# EAGLE board headstage-64_bga_true-lvds (EAGLE 8.3.2), part 1 of 2
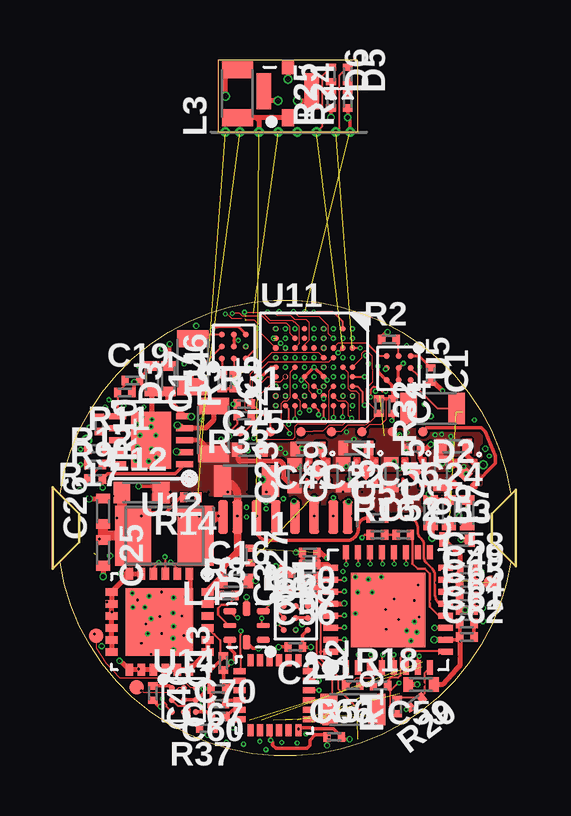
[diagram p0: board, top side]
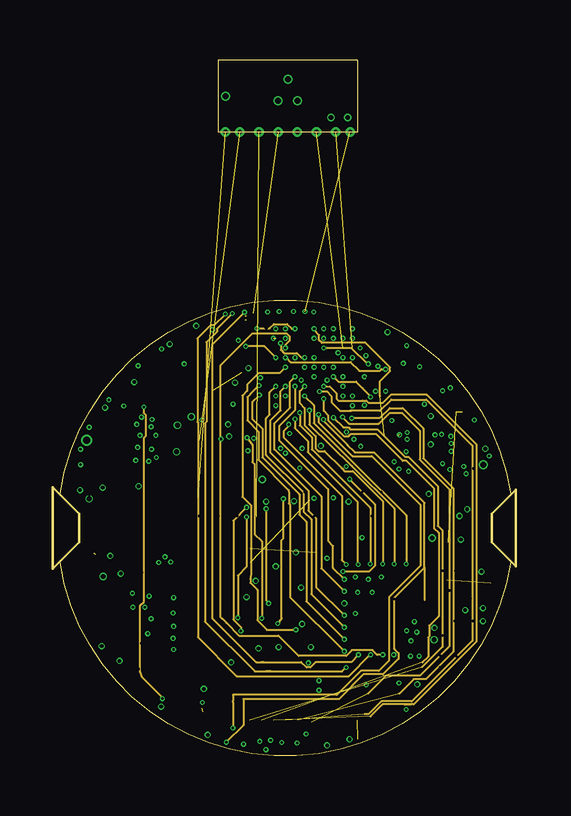
[diagram p1: board, inner layer Route1]
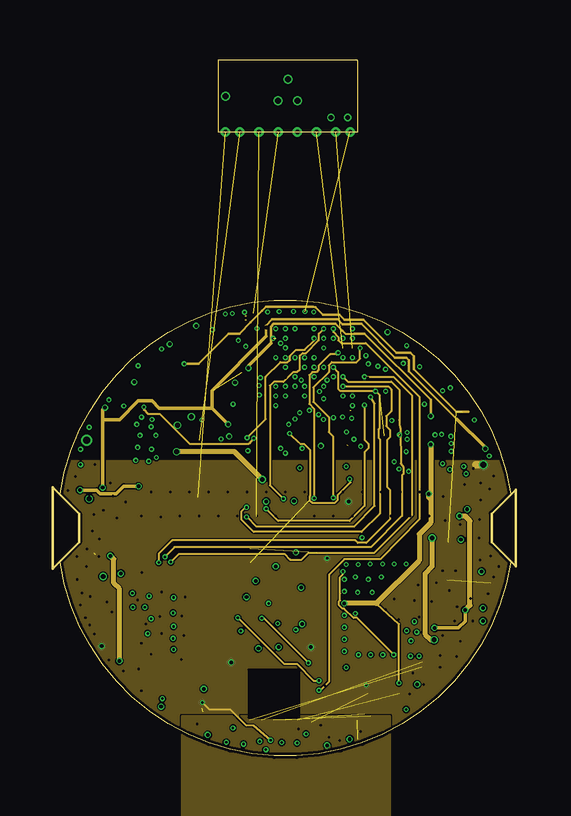
[diagram p2: board, inner layer Route2]
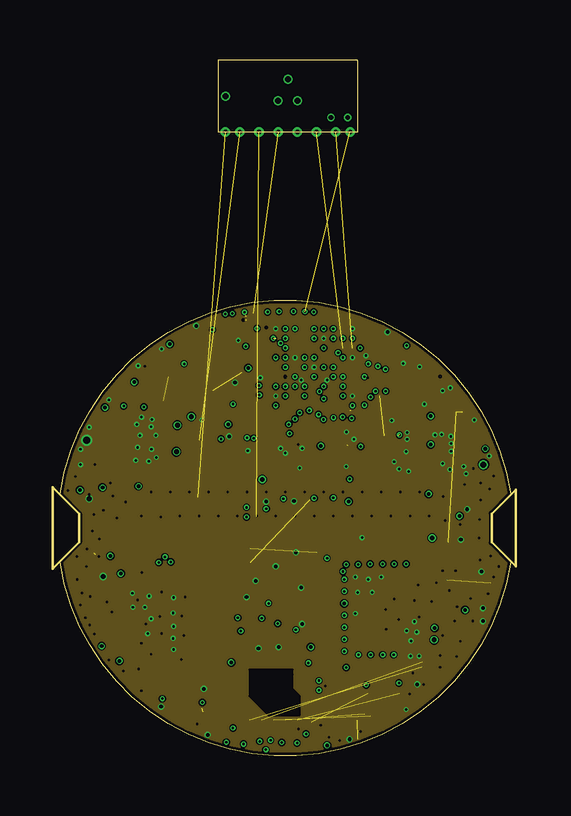
[diagram p3: board, inner layer Route3/GND]
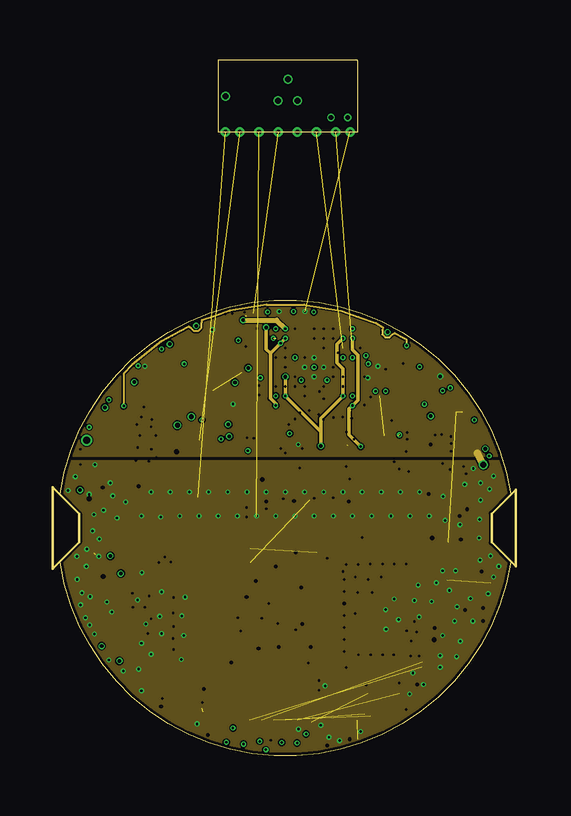
[diagram p4: board, inner layer PWR/AGND]
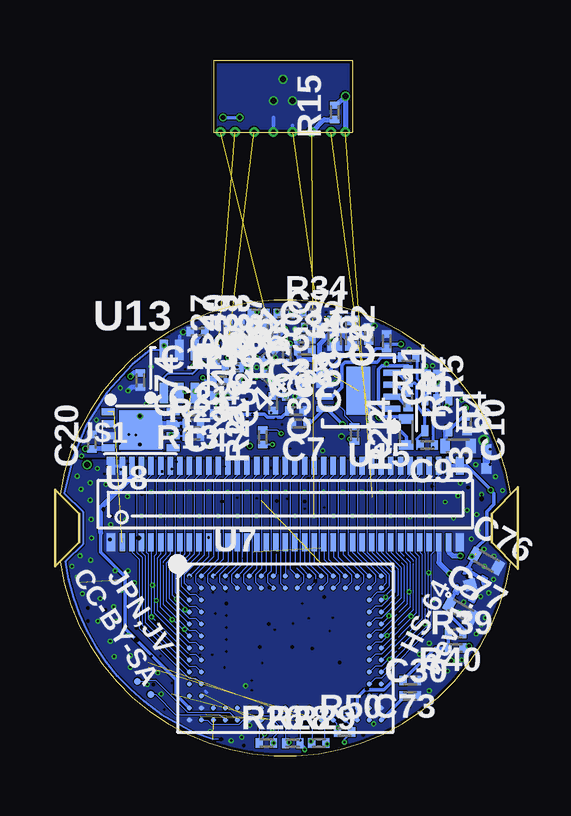
[diagram p5: board, bottom side, seen from below]

Size 18.8 x 28.99 mm. Coordinates in mm from the lower left corner, seen from the top.
Outline: 12.4,25.99 6.6,25.99 6.6,28.99 12.4,28.99 12.4,25.99
Outline: 0,10.89 0.8,10.09 0.8,8.89 0,8.09 arc163 18.8,8.09 18,8.89 18,10.09 18.8,10.89 arc163 0,10.89
Copper layers ((1+2*3+4)*(5+16)): Top 0.036mm / dielectric 4mil / Route1 0.036mm / dielectric 5mil / Route2 0.036mm / dielectric 0.10921875mm / Route3/GND 0.036mm / dielectric 5mil / PWR/AGND 0.036mm / dielectric 4mil / Bottom 0.036mm
Design rules "speedy-6-layer *": minimum track width 2mil, minimum drill 0.1mm, track to track 2mil, track to pad 2mil, pad to pad 2mil, via to via 2mil, smd to smd 2mil, copper to edge 5mil, drill to drill 5mil, minimum pad ring 2mil, minimum via ring 2mil, stop-mask expansion 1mil, vias tented up to drill 20mil, thermal gap 10mil
Net classes: 1 thick: width 0.102 mm
tKeepout: area -0.1,6.6 to 1.4,12.4; area 17.4,6.6 to 18.9,12.4
tRestrict: area -0.1,6.6 to 1.4,12.4; area 17.4,6.6 to 18.9,12.4
Milling: 8 lines

## Footprints (pad centres in the part's own frame; a part is rotated, then mirrored left to right if it is on the bottom)
0201T = smd 0.3 x 0.4: 1 -0.3,0; 2 0.3,0
0402T = smd 0.4 x 0.6: 1 -0.533,0; 2 0.533,0
0805T = smd 0.7 x 1.3: 1 -1,0; 2 1,0
LED-0201T = smd 0.3 x 0.4: 1 -0.3,0; 2 0.3,0
HEADSTAGE64-EDGE-MOUNT_PADS = smd 0.4 x 1.4: 1 -2.6,0; 2 -2,0; 3 -1.2,0; 4 -0.4,0; 5 0.4,0; 6 1.2,0; 7 2,0; 8 2.6,0
HEADSTAGE64-EDGE-MOUNT_CASTELLATED = drill 0.2 pad 0.406: 1 -2.6,0; 2 -2,0; 3 -1.2,0; 4 -0.4,0; 5 0.4,0; 6 1.2,0; 7 2,0; 8 2.6,0
0201_LINK = smd 0.432 x 0.432: 1 -0.394,0; 2 0.394,0
1210T = smd 1.5 x 2.5: 1 -1.3,0; 2 1.3,0
0603T = smd 0.7 x 0.9: 1 -0.82,0; 2 0.82,0
B0.4MM = smd 0.4 x 0.4: TP 0,0
TP06R = smd 0.6 x 0.6: TP 0,0
B0.3MM = smd 0.3 x 0.3: TP 0,0
WLCSP3X3 = smd 0.25 x 0.25: A1 -0.5,0.5; A2 0,0.5; A3 0.5,0.5; B1 -0.5,0; B2 0,0; B3 0.5,0; C1 -0.5,-0.5; C2 0,-0.5; C3 0.5,-0.5
QFN24-3X3_NO-PAD = smd 0.5 x 0.25: 1 -1.45,1; 2 -1.45,0.6; 3 -1.45,0.2; 4 -1.45,-0.2; 5 -1.45,-0.6; 6 -1.45,-1; 13 1.45,-0.2; 14 1.45,-0.6; 15 1.45,-1; 16 1.45,0.2; 17 1.45,0.6; 18 1.45,1 | smd 0.25 x 0.5: 7 -0.2,-1.45; 8 -0.6,-1.45; 9 -1,-1.45; 10 0.2,-1.45; 11 0.6,-1.45; 12 1,-1.45; 19 0.2,1.45; 20 0.6,1.45; 21 1,1.45; 22 -0.2,1.45; 23 -0.6,1.45; 24 -1,1.45
QFN24-4X4 = smd 0.5 x 0.3: 1 -2,1.25; 2 -2,0.75; 3 -2,0.25; 4 -2,-0.25; 5 -2,-0.75; 6 -2,-1.25; 13 2,-1.25; 14 2,-0.75; 15 2,-0.25; 16 2,0.25; 17 2,0.75; 18 2,1.25 | smd 0.3 x 0.5: 7 -1.25,-2; 8 -0.75,-2; 9 -0.25,-2; 10 0.25,-2; 11 0.75,-2; 12 1.25,-2; 19 1.25,2; 20 0.75,2; 21 0.25,2; 22 -0.25,2; 23 -0.75,2; 24 -1.25,2 | smd 2.8 x 2.8: PAD 0,0
PDSO-N5 = smd 0.45 x 0.3: 1 -0.65,0.5; 2 -0.65,0; 3 -0.65,-0.5; 4 0.65,-0.5; 5 0.65,0.5
BGA104_0.5MM = smd 0.2 x 0.2: A1 -4,3; A2 -3.5,3; A3 -3,3; A4 -2.5,3; A5 -2,3; A6 -1.5,3; A7 -1,3; A8 -0.5,3; A9 0,3; A10 0.5,3; A11 1,3; A12 1.5,3; A13 2,3; A14 2.5,3; A15 3,3; A16 3.5,3; A17 4,3; B1 -4,2.5; B2 -3.5,2.5; B3 -3,2.5; B4 -2.5,2.5; B5 -2,2.5; B6 -1.5,2.5; B7 -1,2.5; B8 -0.5,2.5; B9 0,2.5; B10 0.5,2.5; B11 1,2.5; B12 1.5,2.5; B13 2,2.5; B14 2.5,2.5; B15 3,2.5; B16 3.5,2.5; B17 4,2.5; C1 -4,2; C2 -3.5,2; C16 3.5,2; C17 4,2; D1 -4,1.5; D2 -3.5,1.5; D16 3.5,1.5; D17 4,1.5; E1 -4,1; E2 -3.5,1; E16 3.5,1; E17 4,1; F1 -4,0.5; F2 -3.5,0.5; F16 3.5,0.5; F17 4,0.5; G1 -4,0; G2 -3.5,0; G16 3.5,0; G17 4,0; H1 -4,-0.5; H2 -3.5,-0.5; H16 3.5,-0.5; H17 4,-0.5; J1 -4,-1; J2 -3.5,-1; J16 3.5,-1; J17 4,-1; K1 -4,-1.5; K2 -3.5,-1.5; K16 3.5,-1.5; K17 4,-1.5; L1 -4,-2; L2 -3.5,-2; L16 3.5,-2; L17 4,-2; M1 -4,-2.5; M2 -3.5,-2.5; M3 -3,-2.5; M4 -2.5,-2.5; M5 -2,-2.5; M6 -1.5,-2.5; M7 -1,-2.5; M8 -0.5,-2.5; M9 0,-2.5; M10 0.5,-2.5; M11 1,-2.5; M12 1.5,-2.5; M13 2,-2.5; M14 2.5,-2.5; M15 3,-2.5; M16 3.5,-2.5; M17 4,-2.5; N1 -4,-3; N2 -3.5,-3; N3 -3,-3; N4 -2.5,-3; N5 -2,-3; N6 -1.5,-3; N7 -1,-3; N8 -0.5,-3; N9 0,-3; N10 0.5,-3; N11 1,-3; N12 1.5,-3; N13 2,-3; N14 2.5,-3; N15 3,-3; N16 3.5,-3; N17 4,-3
LFCSP8-2X3 = smd 0.55 x 0.3: 1 -1.35,0.75; 2 -1.35,0.25; 3 -1.35,-0.25; 4 -1.35,-0.75; 5 1.35,-0.75; 6 1.35,-0.25; 7 1.35,0.25; 8 1.35,0.75 | smd 1.8 x 1.65: PAD 0,0
X2SON = smd 0.21 x 0.21: 1 -0.45,0.4; 2 -0.45,-0.4; 3 0.45,-0.4; 4 0.45,0.4 | smd 0.48 x 0.48 rotated 45: 5 0,0
VBGA81-4X4 = smd 0.23 x 0.23: A1 1.6,1.6; A2 1.2,1.6; A3 0.8,1.6; A4 0.4,1.6; A5 0,1.6; A6 -0.4,1.6; A7 -0.8,1.6; A8 -1.2,1.6; A9 -1.6,1.6; B1 1.6,1.2; B2 1.2,1.2; B3 0.8,1.2; B4 0.4,1.2; B5 0,1.2; B6 -0.4,1.2; B7 -0.8,1.2; B8 -1.2,1.2; B9 -1.6,1.2; C1 1.6,0.8; C2 1.2,0.8; C3 0.8,0.8; C4 0.4,0.8; C5 0,0.8; C6 -0.4,0.8; C7 -0.8,0.8; C8 -1.2,0.8; C9 -1.6,0.8; D1 1.6,0.4; D2 1.2,0.4; D3 0.8,0.4; D4 0.4,0.4; D5 0,0.4; D6 -0.4,0.4; D7 -0.8,0.4; D8 -1.2,0.4; D9 -1.6,0.4; E1 1.6,0; E2 1.2,0; E3 0.8,0; E4 0.4,0; E5 0,0; E6 -0.4,0; E7 -0.8,0; E8 -1.2,0; E9 -1.6,0; F1 1.6,-0.4; F2 1.2,-0.4; F3 0.8,-0.4; F4 0.4,-0.4; F5 0,-0.4; F6 -0.4,-0.4; F7 -0.8,-0.4; F8 -1.2,-0.4; F9 -1.6,-0.4; G1 1.6,-0.8; G2 1.2,-0.8; G3 0.8,-0.8; G4 0.4,-0.8; G5 0,-0.8; G6 -0.4,-0.8; G7 -0.8,-0.8; G8 -1.2,-0.8; G9 -1.6,-0.8; H1 1.6,-1.2; H2 1.2,-1.2; H3 0.8,-1.2; H4 0.4,-1.2; H5 0,-1.2; H6 -0.4,-1.2; H7 -0.8,-1.2; H8 -1.2,-1.2; H9 -1.6,-1.2; J1 1.6,-1.6; J2 1.2,-1.6; J3 0.8,-1.6; J4 0.4,-1.6; J5 0,-1.6; J6 -0.4,-1.6; J7 -0.8,-1.6; J8 -1.2,-1.6; J9 -1.6,-1.6
DFN103X3 = smd 0.7 x 0.25: 1 -1.4,1; 2 -1.4,0.5; 3 -1.4,0; 4 -1.4,-0.5; 5 -1.4,-1; 6 1.4,-1; 7 1.4,-0.5; 8 1.4,0; 9 1.4,0.5; 10 1.4,1 | smd 1.65 x 2.38: PAD 0,0
SC70 = smd 0.35 x 0.85: 1 -0.65,-0.9; 2 0,-0.9; 3 0.65,-0.9; 4 0.65,0.9; 5 0,0.9; 6 -0.65,0.9
PWSON-N8-3X3 = smd 0.7 x 0.25: 1 -1.4,0.75; 2 -1.4,0.25; 3 -1.4,-0.25; 4 -1.4,-0.75; 5 1.4,-0.75; 6 1.4,-0.25; 7 1.4,0.25; 8 1.4,0.75 | smd 1 x 2: PAD 0,0
WQFN32-5X5 = smd 0.25 x 0.6: 1 1.75,2.4; 2 1.25,2.4; 3 0.75,2.4; 4 0.25,2.4; 5 -0.25,2.4; 6 -0.75,2.4; 7 -1.25,2.4; 8 -1.75,2.4; 17 -1.75,-2.4; 18 -1.25,-2.4; 19 -0.75,-2.4; 20 -0.25,-2.4; 21 0.25,-2.4; 22 0.75,-2.4; 23 1.25,-2.4; 24 1.75,-2.4 | smd 0.6 x 0.25: 9 -2.4,1.75; 10 -2.4,1.25; 11 -2.4,0.75; 12 -2.4,0.25; 13 -2.4,-0.25; 14 -2.4,-0.75; 15 -2.4,-1.25; 16 -2.4,-1.75; 25 2.4,-1.75; 26 2.4,-1.25; 27 2.4,-0.75; 28 2.4,-0.25; 29 2.4,0.25; 30 2.4,0.75; 31 2.4,1.25; 32 2.4,1.75 | smd 3.1 x 3.1: PAD 0,0
UQFN = smd 0.55 x 0.25: P$1 -0.7,0.6; P$3 -0.7,-0.6; P$5 0.7,-0.6; P$7 0.7,0.6 | smd 0.55 x 0.2: P$2 -0.7,0; P$6 0.7,0 | smd 0.3 x 0.6: P$4 0,-0.7; P$8 0,0.7
DF40-70HEAD = smd 0.23 x 0.75: 1 -6.8,-1.585; 2 -6.4,-1.585; 3 -6,-1.585; 4 -5.6,-1.585; 5 -5.2,-1.585; 6 -4.8,-1.585; 7 -4.4,-1.585; 8 -4,-1.585; 9 -3.6,-1.585; 10 -3.2,-1.585; 11 -2.8,-1.585; 12 -2.4,-1.585; 13 -2,-1.585; 14 -1.6,-1.585; 15 -1.2,-1.585; 16 -0.8,-1.585; 17 -0.4,-1.585; 18 0,-1.585; 19 0.4,-1.585; 20 0.8,-1.585; 21 1.2,-1.585; 22 1.6,-1.585; 23 2,-1.585; 24 2.4,-1.585; 25 2.8,-1.585; 26 3.2,-1.585; 27 3.6,-1.585; 28 4,-1.585; 29 4.4,-1.585; 30 4.8,-1.585; 31 5.2,-1.585; 32 5.6,-1.585; 33 6,-1.585; 34 6.4,-1.585; 35 6.8,-1.585; 36 6.8,1.585; 37 6.4,1.585; 38 6,1.585; 39 5.6,1.585; 40 5.2,1.585; 41 4.8,1.585; 42 4.4,1.585; 43 4,1.585; 44 3.6,1.585; 45 3.2,1.585; 46 2.8,1.585; 47 2.4,1.585; 48 2,1.585; 49 1.6,1.585; 50 1.2,1.585; 51 0.8,1.585; 52 0.4,1.585; 53 0,1.585; 54 -0.4,1.585; 55 -0.8,1.585; 56 -1.2,1.585; 57 -1.6,1.585; 58 -2,1.585; 59 -2.4,1.585; 60 -2.8,1.585; 61 -3.2,1.585; 62 -3.6,1.585; 63 -4,1.585; 64 -4.4,1.585; 65 -4.8,1.585; 66 -5.2,1.585; 67 -5.6,1.585; 68 -6,1.585; 69 -6.4,1.585; 70 -6.8,1.585 | smd 0.35 x 0.75: M1 -7.275,-1.585; M2 7.275,-1.585; M3 7.275,1.585; M4 -7.275,1.585
X_FL_R_SMT_1(02) = smd 0.5 x 0.7: P$1 0,-1.1 | smd 0.6 x 1.5: P$2 -1,0; P$4 1,0 | smd 0.5 x 0.6: P$3 0,1

## Placement (x,y rotation side)
C1  1uF  [0201T]  15.46,15.87 270 top
C2  0.1uF  [0201T]  9.81,4.54 180 top
C3  1uF  [0201T]  9.62,7.27 90 top
C4  0.1uF  [0201T]  13.9,14.57 270 top
C5  1uF  [0201T]  6.78,15.59 270 top
C6  0.1uF  [0201T]  5.92,17.57 90 bottom
C7  0.1uF  [0201T]  8.8,13.85 180 bottom
C8  0.1uF  [0201T]  5.18,17.27 90 bottom
C9  470pF  [0201T]  3.48,12.95 180 bottom
C10  0.1uF  [0201T]  1.82,13.81 270 bottom
C11  0.1uF  [0201T]  3.02,15.63 90 bottom
C12  0.1uF  [0201T]  13.06,17.67 180 bottom
C13  0.1uF  [0201T]  6.82,3.87 90 top
C14  1uF  [0402T]  4.36,13.49 90 bottom
C15  1uF  [0402T]  15.88,11.77 90 top
C16  1uF  [0402T]  7.32,7.29 0 top
C17  0.22uF  [0402T]  3.84,15.71 270 top
C18  0.22uF  [0402T]  2.2,12.91 0 bottom
C19  10pF  [0201T]  3.02,15.63 0 top
C20  0.1uF  [0201T]  17.47,13.09 90 bottom
C21  0.1uF  [0201T]  13.24,13.85 0 bottom
C22  10uF  [0402T]  12.34,12.82 180 top
C23  1uF  [0402T]  9.78,11.67 90 top
C24  10uF  [0402T]  16.44,12.9 180 top
C25  4.7uF  [0402T]  1.8,8.45 270 top
C26  0.1uF  [0402T]  1.8,10.19 90 top
C27  10nF  [0201T]  11.8,17.69 90 bottom
C28  47nF  [0201T]  11.1,16.69 135 bottom
C29  4.7nF  [0201T]  12.1,14.99 180 bottom
C30  10nF  [0201T]  4.2,2.49 0 bottom
C31  4.7nF  [0201T]  10.1,16.69 45 bottom
C32  4.7nF  [0201T]  8.96,14.37 0 bottom
C33  22nF  [0201T]  8.6,17.39 0 bottom
C34  47nF  [0201T]  8.6,16.89 0 bottom
C35  2.2nF  [0201T]  9.1,14.99 0 bottom
C36  0.1uF  [0201T]  9.9,14.69 270 bottom
C37  4.7nF  [0201T]  9.8,17.69 90 bottom
C38  10nF  [0201T]  10.3,17.69 90 bottom
C39  22nF  [0201T]  10.8,17.69 90 bottom
C40  0.47uF  [0201T]  11.3,17.69 90 bottom
C41  22uF  [0402T]  10.34,12.78 180 top
C42  10uF  [0402T]  7.34,17.61 270 bottom
C43  10nF  [0201T]  10.1,15.69 315 bottom
C44  22nF  [0201T]  11.08,15.69 225 bottom
C45  0.47uF  [0201T]  11.6,16.19 180 bottom
C46  1uF  [0201T]  3.88,2.61 270 top
C47  10nF  [0201T]  12.1,14.23 180 bottom
C48  0.1uF  [0201T]  10.42,7.97 180 top
C49  10nF  [0201T]  16.97,7.19 0 top
C50  10nF  [0201T]  10.42,8.47 180 top
C51  0.1uF  [0201T]  13.24,9.91 0 top
C52  47nF  [0201T]  14.32,9.21 0 top
C53  22uF  [0402T]  16.56,9.01 0 top
C54  1uF  [0402T]  13.82,11.71 90 top
C55  1uF  [0201T]  14.74,12.81 180 top
C56  0.1uF  [0201T]  10.42,7.01 180 top
C57  10nF  [0201T]  10.42,7.48 180 top
C58  0.1uF  [0201T]  16.97,7.75 0 top
C59  4.7uF  [0402T]  15.06,2.97 180 top
C60  0.1uF  [0201T]  6.6,2.17 180 top
C61  0.1uF  [0201T]  16.97,5.51 0 top
C62  10nF  [0201T]  16.97,4.95 0 top
C63  4.7uF  [0402T]  16.98,10.13 90 top
C64  0.1uF  [0201T]  16.97,6.07 0 top
C65  10nF  [0201T]  16.97,6.63 0 top
C66  10nF  [0201T]  11.44,0.79 0 top
C67  0.1uF  [0201T]  6.6,2.79 180 top
C68  1uF  [0201T]  8.64,15.83 270 bottom
C69  1uF  [0402T]  11.82,11.71 90 top
C70  0.1uF  [0201T]  6.62,1.63 0 top
C71  22nF  [0201T]  8.3,17.85 0 bottom
C72  0.47uF  [0201T]  12.34,16.67 270 bottom
C73  0.1uF  [0201T]  4.19,3.14 180 bottom
C74  1uF  [0201T]  15.44,15.65 270 bottom
C75  1uF  [0402T]  7.92,12.75 0 top
C76  1uF  [0402T]  1.02,8.12 330.9 bottom
C77  10uF  [0402T]  2.09,6.06 330.9 bottom
D1  [0805T]  12.22,1.93 0 top
D2  [0805T]  15.54,14.47 180 top
D3  [0805T]  5.54,16.37 90 top
D4  VSKY05401006  [0402T]  4.52,15.71 270 top
D5  XZVGR155W  [LED-0201T]  12,28.39 270 top
D6  XZVGR155W  [LED-0201T]  11.3,28.39 270 top
J1  HEADSTAGE64_EDGE-MOUNT  [HEADSTAGE64-EDGE-MOUNT_PADS]  9.4,9.95 0 top
J2  HEADSTAGE64_EDGE-MOUNT_CASTELLATED  [HEADSTAGE64-EDGE-MOUNT_CASTELLATED]  9.5,25.99 0 top
J3  GND_LINK_0201  [0201_LINK]  1.02,12.37 90 bottom
L1  MLZ2012M100WT000  [0805T]  7.78,11.45 180 top
L2  MLZ2012M100WT000  [0805T]  6.4,13.57 270 top
L3  CIG21L4R7MNE  [0805T]  7.4,27.59 90 top
L4  CBC3225T101MR  [1210T]  4.36,9.17 180 top
L5  BLM15PX601SN1D  [0402T]  6.62,17.61 90 bottom
L6  BLM15PX601SN1D  [0402T]  15.46,10.13 270 top
L7  BLM15PX601SN1D  [0402T]  16.22,10.13 270 top
L12  BLM18KG601SN1D  [0603T]  3.4,10.97 0 top
R1  15k  [0201T]  9.1,7.27 270 top
R2  15k  [0201T]  13.72,17.35 0 top
R3  15k  [0201T]  7.28,15.59 90 top
R4  10k  [0201T]  4.26,16.61 180 bottom
R5  10k  [0201T]  3.54,15.63 270 bottom
R6  5.49k  [0201T]  4.28,14.81 270 bottom
R7  220  [0201T]  4.28,15.83 270 bottom
R8  600  [0201T]  7,6.67 0 top
R9  1M  [0201T]  1.47,11.53 0 top
R10  83.3k  [0201T]  1.64,13.81 270 top
R11  1M  [0201T]  2.7,15.13 180 top
R12  90.9k  [0201T]  1.47,12.13 0 top
R13  50  [0201T]  13.24,14.35 180 bottom
R14  1k  [0201T]  5.46,10.77 180 top
R15  1k  [0201T]  7.34,26.81 90 bottom
R16  49.9  [0201T]  13.24,9.21 0 top
R17  10k  [0201T]  1.47,12.79 180 top
R18  10k  [0201T]  13.37,2.93 0 top
R19  10k  [0201T]  14.06,2.05 90 top
R20  100k  [0201T]  14.84,2.23 216.8 top
R21  4.7k  [0201T]  10.34,13.27 90 bottom
R22  4.7k  [0201T]  6.52,13.41 270 bottom
R23  10k  [0201T]  13.24,13.33 0 bottom
R24  2k  [0201T]  12,27.29 90 top
R25  2k  [0201T]  11.3,27.29 90 top
R26  100  [0201T]  10.19,0.53 0 bottom
R27  4.7k  [0201T]  7.93,8.35 270 top
R28  100  [0201T]  9.09,0.52 0 bottom
R29  100  [0201T]  8,0.53 0 bottom
R30  10k  [0201T]  12.12,15.63 0 bottom
R31  10k  [0201T]  7.68,14.65 0 top
R32  10k  [0201T]  13.3,14.57 270 top
R33  1k  [0201T]  7.68,14.17 180 top
R34  10k  [0201T]  8.36,18.43 0 bottom
R35  10k  [0201T]  9.44,18.43 180 bottom
R36  10k  [0201T]  10.52,18.43 180 bottom
R37  15k  [0201T]  6.12,1.15 180 top
R38  10k  [0201T]  9.34,16.7 90 bottom
R39  0 (DNP)  [0201T]  2.3,4.49 0 bottom
R40  0  [0201T]  2.3,5.09 180 bottom
R50  100  [0201T]  6.93,0.99 0 bottom
R51  4.7k  [0201T]  12.22,2.95 180 top
TP1  VCC  [B0.4MM]  13.87,13.5 270 top
TP2  gnd  [B0.4MM]  12.6,13.5 270 top
TP3  [B0.4MM]  10.06,13.5 270 top
TP4  [B0.4MM]  11.33,13.5 270 top
TP5  [B0.4MM]  7.52,13.5 270 top
TP6  [B0.4MM]  8.79,13.5 270 top
TP7  [TP06R]  17.98,7.21 0 top
TP8  VCC  [B0.3MM]  15.57,3.1 0 bottom
TP9  [TP06R]  1.52,5.01 0 top
TP10  VCC  [B0.3MM]  15.02,2.56 0 bottom
TP11  [TP06R]  3.2,2.85 0 top
TP12  [B0.4MM]  15.14,13.5 0 top
U1  TS4231  [WLCSP3X3]  9.84,5.75 0 top
U2  MPU9250_QFN_NO-PAD  [QFN24-3X3_NO-PAD]  8.94,2.52 270 top
U3  CAT4016_QFN  [QFN24-4X4]  4.15,5.58 270 top
U4  OPA170  [PDSO-N5]  3.08,14.19 270 bottom
U5  TS4231  [WLCSP3X3]  14.12,16.15 270 top
U6  TS4231  [WLCSP3X3]  7.26,17.06 90 top
U7  [BGA104_0.5MM]  9.4,4.49 0 bottom
U8  ADG1401  [LFCSP8-2X3]  15.44,13.58 0 bottom
U9  TLV70725  [X2SON]  12.76,11.81 270 top
U10  TLV70718  [X2SON]  14.76,11.81 270 top
U11  10M08DC  [VBGA81-4X4]  10.6,16.19 0 top
U12  LT3463  [DFN103X3]  3.8,13.15 180 top
U13  DAC5311  [SC70]  13.82,16.01 0 bottom
U14  TS4231  [WLCSP3X3]  5.16,2.33 0 top
U15  INA826  [PWSON-N8-3X3]  6.36,15.21 180 bottom
U16  TLV70733  [X2SON]  1.69,7.12 60.9 bottom
U17  TLV70712  [X2SON]  10.76,11.79 270 top
U18  TLV70733  [X2SON]  16.88,11.75 270 top
U19  DS90UB913A_WQFN  [WQFN32-5X5]  13.69,6.08 180 top
U25  TPL0501_UQFN  [UQFN]  7.78,5.43 180 top
U$1  [DF40-70HEAD]  9.4,10.49 0 bottom
X1  X.FL-R-SMT-1  [X_FL_R_SMT_1(02)]  9.5,27.69 0 top

## Library data of the parts
C1 C3 C5 C46 C55 C68 C74 = jonnew; PARTNO: CL03A105MP3ZSNH
C2 C4 C6 C12 C13 C26 C70 = jonnew; PARTNO: C0603X5R1C104K030BC
C7 C8 C11 C20 C21 = jonnew; PARTNO: CL03A104KA3NNNC
C9 C19 C27-C29 C31-C39 C43 C44 C47-C50 C56-C58 C60-C62 C64 C65 C67 C71 C73 D1-D6 J1-J3 L1-L4 L12 R1-R40 R50 R51 TP1-TP12 U1 U2 U5-U7 U9-U14 U16-U19 U$1 X1 = jonnew
C10 = jonnew; PARTNP: CL03A104KA3NNNC
C14-C16 C23 C54 C69 C75 C76 = jonnew; PARTNO: CL05A105KO5NNNC
C17 C18 = jonnew; PARTNO: UMK105BJ224KV-F
C22 C24 C42 C77 = jonnew; PARTNO: CL05A106MQ5NUNC
C25 = jonnew; PARTNO: CL05A475MO5NUNC
C30 = jonnew; PARTNO: GRM033R71E103KE14D
C40 C45 C72 = jonnew; PARTNO: GRM033R60J474KE90D
C41 = jonnew; PARTNO: CL05A226MQ6ZUN8
C51 = jonnew; PARTNO: C1005X7R1H104K050BB
C52 = jonnew; PARTNO: C1005X7R1H473K050BB
C53 = jonnew; PARTNO: CL05A226MQ5QUNC
C59 C63 = jonnew; PARTNO: GRM155R61A475MEAAD
C66 = jonnew; PARTNO: CL03B103KP3NNNC
L5-L7 = jonnew; PARTNO: BLM15PX601SN1D
U3 = jonnew; PARTNO: CAT4016HV6-GT2
U4 = jonnew; PARTNO: OPA170AIDBVR
U8 = jonnew; PARTNO: ADG1401BCPZ
U15 = jonnew; PARTNO: INA826AIDRGR
U25 = jonnew; PARTNO: TPL0501-100RSER

## Nets
$N324: C37.1 C38.1 C39.1 C40.1 C42.1 L5.2 U11.A8
+1V2: C27.1 C29.1 C33.1 C34.1 C35.1 C36.1 C41.1 C68.1 L5.1 U11.B2 U11.B9 U11.H2 U11.H8 U17.1
+1V8: C55.1 C56.1 C57.1 L6.1 L7.1 R19.1 U10.1 U19.28
+2V5: C22.1 C32.1 C47.1 C71.1 C72.1 U9.1 U11.B1 U11.B8 U11.J1 U11.J9
+3V3: C2.1 C4.1 C6.1 C12.1 C13.1 C24.1 C28.1 C31.1 C43.1 C44.1 C45.1 C48.1 C50.1 C66.1 C67.1 C70.1 C74.1 J1.8 J2.8 R5.1 R18.1 R21.1 R22.1 R24.1 R25.1 R27.1 R30.1 R31.1 R32.1 R35.1 R36.1 R38.1 R39.2 R51.1 TP2.TP U1.C3 U2.8 U2.13 U5.C3 U6.C3 U7.M16 U11.D5 U11.E4 U11.E6 U11.F5 U13.4 U14.C3 U18.1 U19.25 U25.P$7
+3V3_AN: C77.1 R40.1 U16.1
AGND: C30.2 C73.1 C76.2 C77.2 J3.1 U7.M2 U7.M17 U7.N1 U7.N6 U16.2 U16.5 U$1.70 U$1.M1 U$1.M2 U$1.M4
AUXIN2: TP10.TP U7.N4
AUXIN3: TP8.TP U7.N5
CONF_DONE: R36.2 U11.A2
CONFIG_SEL: R34.1 U11.C6
DAC_CS: U11.C4 U13.1
DATA1: U1.C1 U11.A4
DATA2: U5.C1 U11.C3
DATA3: U6.C1 U11.A7
DATA4: U11.G3 U14.C1
DIN0: U11.H6 U19.19
DIN1: U11.J6 U19.20
DIN2: U11.G6 U19.21
DIN3: U11.H7 U19.22
DIN4: U11.J7 U19.23
DIN5: U11.J8 U19.24
DIN6: U11.G7 U19.26
DIN7: U11.F7 U19.27
DIN8: U11.G8 U19.29
DIN9: U11.G9 U19.30
DIN10: U11.F8 U19.31
DIN11: U11.F9 U19.32
E0: U7.K2 U$1.2
E1: U7.J1 U$1.68
E2: U7.J2 U$1.3
E3: U7.H1 U$1.67
E4: U7.H2 U$1.4
E5: U7.G1 U$1.66
E6: U7.G2 U$1.5
E7: U7.F1 U$1.65
E8: U7.F2 U$1.6
E9: U7.E1 U$1.64
E10: U7.E2 U$1.7
E11: U7.D1 U$1.63
E12: U7.D2 U$1.8
E13: U7.C1 U$1.62
E14: U7.C2 U$1.9
E15: U7.B1 U$1.61
E16: U7.A1 U$1.10
E17: U7.B2 U$1.60
E18: U7.A2 U$1.11
E19: U7.B3 U$1.59
E20: U7.A3 U$1.12
E21: U7.B4 U$1.58
E22: U7.A4 U$1.13
E23: U7.B5 U$1.57
E24: U7.A5 U$1.14
E25: U7.B6 U$1.56
E26: U7.A6 U$1.15
E27: U7.B7 U$1.55
E28: U7.A7 U$1.16
E29: U7.B8 U$1.54
E30: U7.A8 U$1.17
E31: U7.B9 U$1.53
E32: U7.A9 U$1.18
E33: U7.A10 U$1.52
E34: U7.B10 U$1.19
E35: U7.A11 U$1.51
E36: U7.B11 U$1.20
E37: U7.A12 U$1.50
E38: U7.B12 U$1.21
E39: U7.A13 U$1.49
E40: U7.B13 U$1.22
E41: U7.A14 U$1.48
E42: U7.B14 U$1.23
E43: U7.A15 U$1.47
E44: U7.B15 U$1.24
E45: U7.A16 U$1.46
E46: U7.B16 U$1.25
E47: U7.A17 U$1.45
E48: U7.B17 U$1.26
E49: U7.C16 U$1.44
E50: U7.C17 U$1.27
E51: U7.D16 U$1.43
E52: U7.D17 U$1.28
E53: U7.E16 U$1.42
E54: U7.E17 U$1.29
E55: U7.F16 U$1.41
E56: U7.F17 U$1.30
E57: U7.G16 U$1.40
E58: U7.G17 U$1.31
E59: U7.H16 U$1.39
E60: U7.H17 U$1.32
E61: U7.J16 U$1.38
E62: U7.J17 U$1.33
E63: U7.K16 U$1.37
ENV1: U1.C2 U11.E8
ENV2: U5.C2 U11.D8
ENV3: U6.C2 U11.D9
ENV4: U14.C2
ESTIM_POW_EN: R17.1 U12.8 U12.9
GND: C1.2 C2.2 C3.2 C4.2 C5.2 C6.2 C7.2 C8.2 C10.2 C11.2 C12.2 C13.2 C15.2 C16.2 C17.2 C18.2 C20.2 C21.2 C22.2 C23.2 C24.2 C25.2 C26.2 C27.2 C28.2 C29.2 C31.2 C32.2 C33.2 C34.2 C35.2 C36.2 C37.2 C38.2 C39.2 C40.2 C41.2 C42.2 C43.2 C44.2 C45.2 C46.2 C47.2 C48.2 C49.2 C50.2 C53.2 C54.2 C55.2 C56.2 C57.2 C58.2 C59.2 C60.2 C61.2 C62.2 C63.2 C64.2 C65.2 C66.2 C67.2 C68.2 C69.2 C70.2 C71.2 C72.2 C74.2 C75.2 J1.4 J1.5 J2.4 J2.5 J3.2 R1.1 R2.1 R3.1 R12.1 R13.1 R16.1 R17.2 R20.2 R23.2 R33.2 R34.2 R37.1 TP1.TP U1.B2 U1.B3 U2.11 U2.18 U3.1 U3.21 U3.PAD U5.B2 U5.B3 U6.B2 U6.B3 U8.3 U9.2 U9.5 U10.2 U10.5 U11.A1 U11.A9 U11.B4 U11.D1 U11.D7 U11.E5 U11.E9 U11.F4 U11.F6 U11.H1 U11.H5 U11.H9 U12.PAD U13.5 U14.B2 U14.B3 U15.6 U17.2 U17.5 U18.2 U18.5 U19.6 U19.7 U19.PAD U25.P$4 U25.P$8 X1.P$2 X1.P$3 X1.P$4
GPO0: TP7.TP U19.15
HSYNC: U11.B7 U19.1
IMU_CS: U2.22 U11.A3
INTAN_VDD: C73.2 R39.1 R40.2 U7.M15 U7.N2 U7.N15
ISTIM: R7.1 U8.1 U15.1 U$1.1
JTAGEN: R30.2 U11.D2
LED-1: U3.5 U3.6 U3.7 U3.8 U3.9 U3.10 U3.11 U3.12 U$1.34
LED-2: U3.13 U3.14 U3.15 U3.16 U3.17 U3.18 U3.19 U3.20 U$1.35
LED_CLK: U3.3 U11.F2
LED_LATCH: U3.4 U11.G2
LED_SIN: U3.2 U11.F1
MIDFILT: J1.1 J2.1 L3.2 L4.1 R14.1 R15.2
N$1: R8.2 U25.P$6
N$2: C14.1 L2.1 U12.4
N$3: C19.1 R10.1 R11.2 U12.6
N$4: D1.2 U1.A3
N$5: D1.1 U1.A2
N$6: R1.2 U1.B1
N$7: C3.1 U1.A1
N$8: L1.1 U12.2
N$9: D2.2 U5.A3
N$10: D2.1 U5.A2
N$11: R2.2 U5.B1
N$12: C1.1 U5.A1
N$13: C25.1 C26.1 L4.2 L12.1 R14.2
N$14: R8.1 U3.23
N$15: D3.2 U6.A3
N$16: D3.1 U6.A2
N$17: R3.2 U6.B1
N$18: C5.1 U6.A1
N$19: C14.2 D4.2 U12.5
N$20: R6.2 U15.2
N$21: R6.1 U15.3
N$22: C9.2 R7.2 U4.4 U15.4
N$23: R13.2 U8.8
N$24: R9.1 R12.2 U12.10
N$25: C9.1 R4.1 R5.2 U4.3
N$26: TP9.TP U14.A3
N$27: R10.2 U12.7
N$28: C51.2 U19.13
N$29: D5.2 R24.2
N$30: R18.2 U19.9
N$31: C52.2 U19.12
N$32: C52.1 R16.2
N$33: R19.2 R20.1 U19.8
N$34: C59.1 C61.1 C62.1 L6.2 U19.10
N$35: C49.1 C53.1 C58.1 L7.2 U19.14
N$36: C30.1 U7.N17
N$37: C63.1 C64.1 C65.1 U19.11
N$38: TP11.TP U14.A2
N$39: D6.2 R25.2
N$40: C60.1 U2.10
N$41: R37.2 U14.B1
N$42: C46.1 U14.A1
N$45: R38.2 U11.D6
NSTATUS: R35.2 U11.B3
PCLK: U11.C9 U19.3
POT_CS: U11.G1 U25.P$3
REF: U7.M1 U$1.69
RHD_CLK_+: R28.2 U7.N10 U11.G4
RHD_CLK_-: R28.1 U7.N9 U11.G5
RHD_CS_+: R26.2 U7.N8 U11.H3
RHD_CS_-: R26.1 U7.N7 U11.J2
RHD_MISO_+: R50.2 U11.J4
RHD_MISO_-: R50.1 U7.N13 U11.J5
RHD_MISO_P: U7.N14
RHD_MOSI_+: R29.2 U7.N12 U11.J3
RHD_MOSI_-: R29.1 U7.N11 U11.H4
SCL: R22.2 R51.2 U11.C8 U19.4
SCLK: U2.23 U11.F3 U13.2 U25.P$5
SDA: R21.2 R27.2 U11.E7 U19.5
SDI: U2.24 U11.B5 U25.P$2
SDO: U2.9 U11.E3 U13.3
SIGOUT: C51.1 J1.3 J2.3 L3.1 R15.1 X1.P$1
STATUS_A: D6.1 J1.6 J2.6 U11.C2
STATUS_B: D5.1 J1.7 J2.7 U11.C1
STIM_NULL: R23.1 U8.6 U11.A5
TCK: R33.1 TP5.TP U11.D4
TDI: R32.2 TP4.TP U11.E1
TDO: TP3.TP U11.E2
TMS: R31.2 TP6.TP U11.D3
V+: C7.1 C10.1 C18.1 C20.1 R9.2 U4.5 U8.4 U12.1 U15.8
V-: C8.1 C11.1 C17.1 C19.2 C21.1 D4.1 R11.1 U4.2 U8.7 U8.PAD U15.5 U15.PAD
VCOAX: C15.1 C16.1 C23.1 C54.1 C69.1 C75.1 C76.1 J1.2 J2.2 L1.2 L2.2 L12.2 TP12.TP U3.24 U9.3 U9.4 U10.3 U10.4 U12.3 U16.3 U16.4 U17.3 U17.4 U18.3 U18.4 U$1.36 U$1.M3
VDAC: U4.1 U7.N3 U13.6
VI: R4.2 U15.7
VSYNC: U11.C7 U19.2